# Altium PCB Source_Selector.PcbDoc
Units mm, origin at the board's own origin, x right, y up, seen from the top; angles counter-clockwise.
Board outline 86.21 x 38.86 mm, 4 copper layers (Top Layer, GND, Power, Bottom Layer), stack 1.954 mm thick; 57 components, 40 nets, 185 pads, 18 vias.
Unrouted connection lines stored in the file: 18.
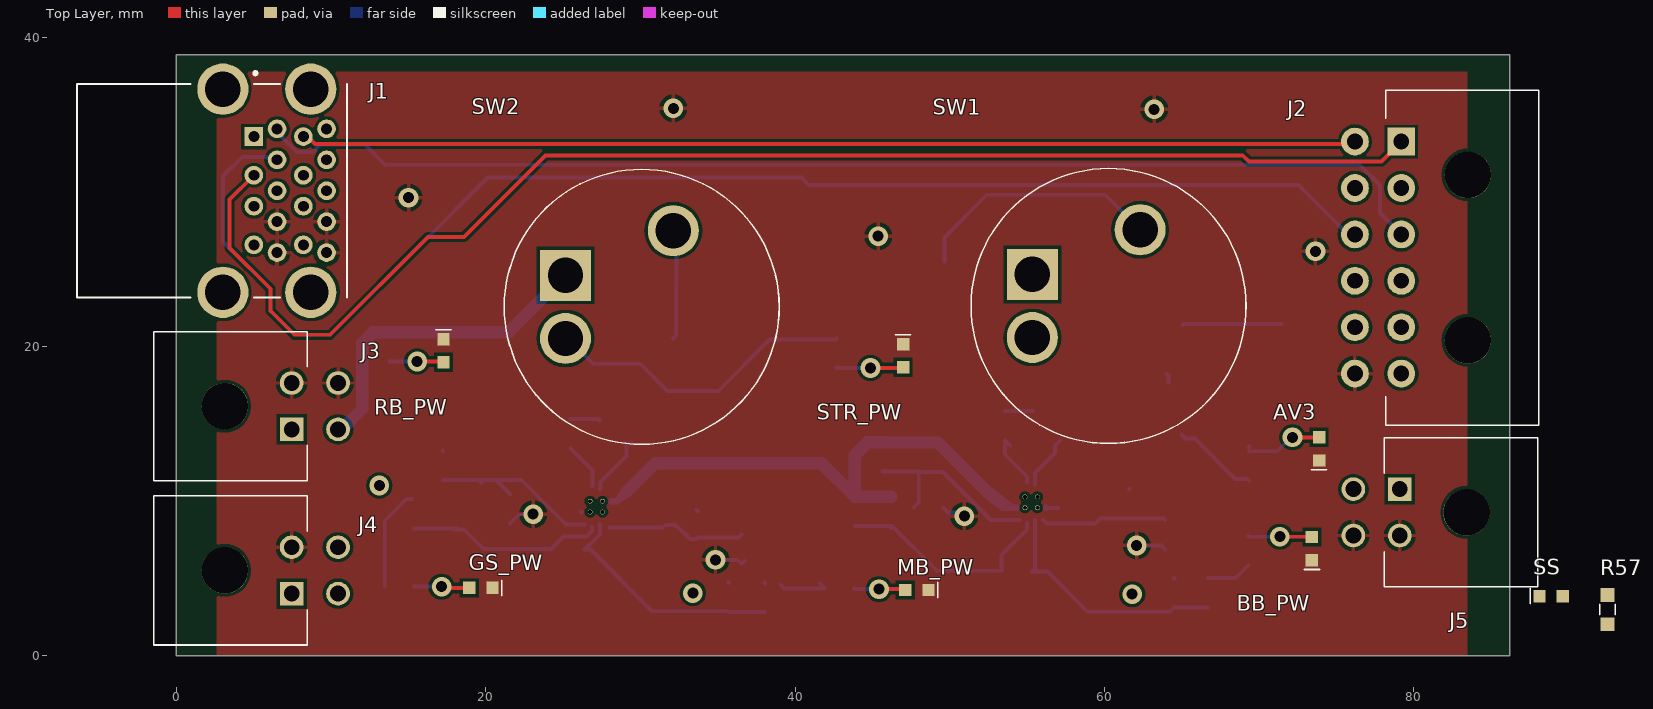
[diagram p0: Top Layer view]
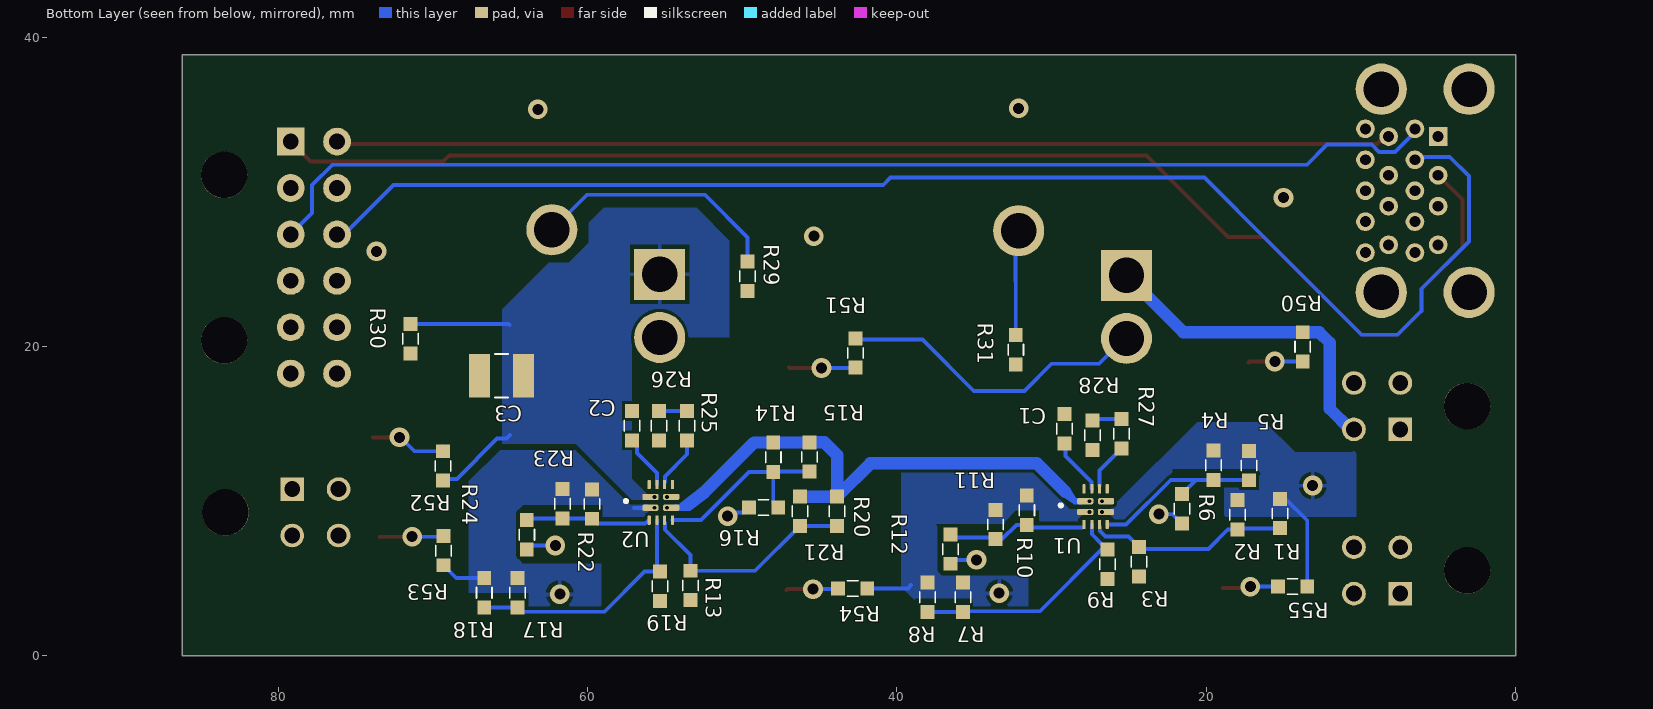
[diagram p1: Bottom Layer view, seen from below]
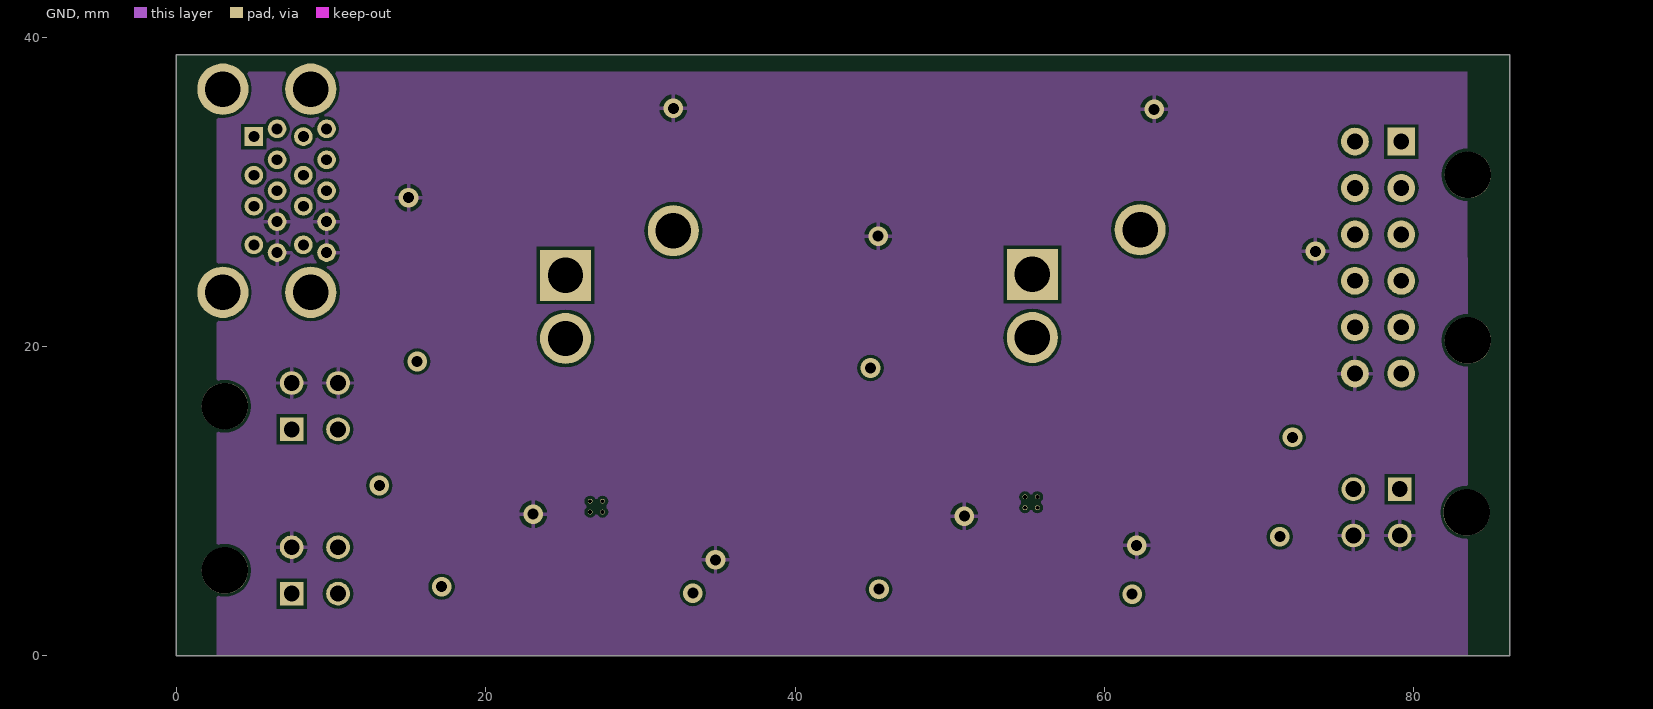
[diagram p2: GND]
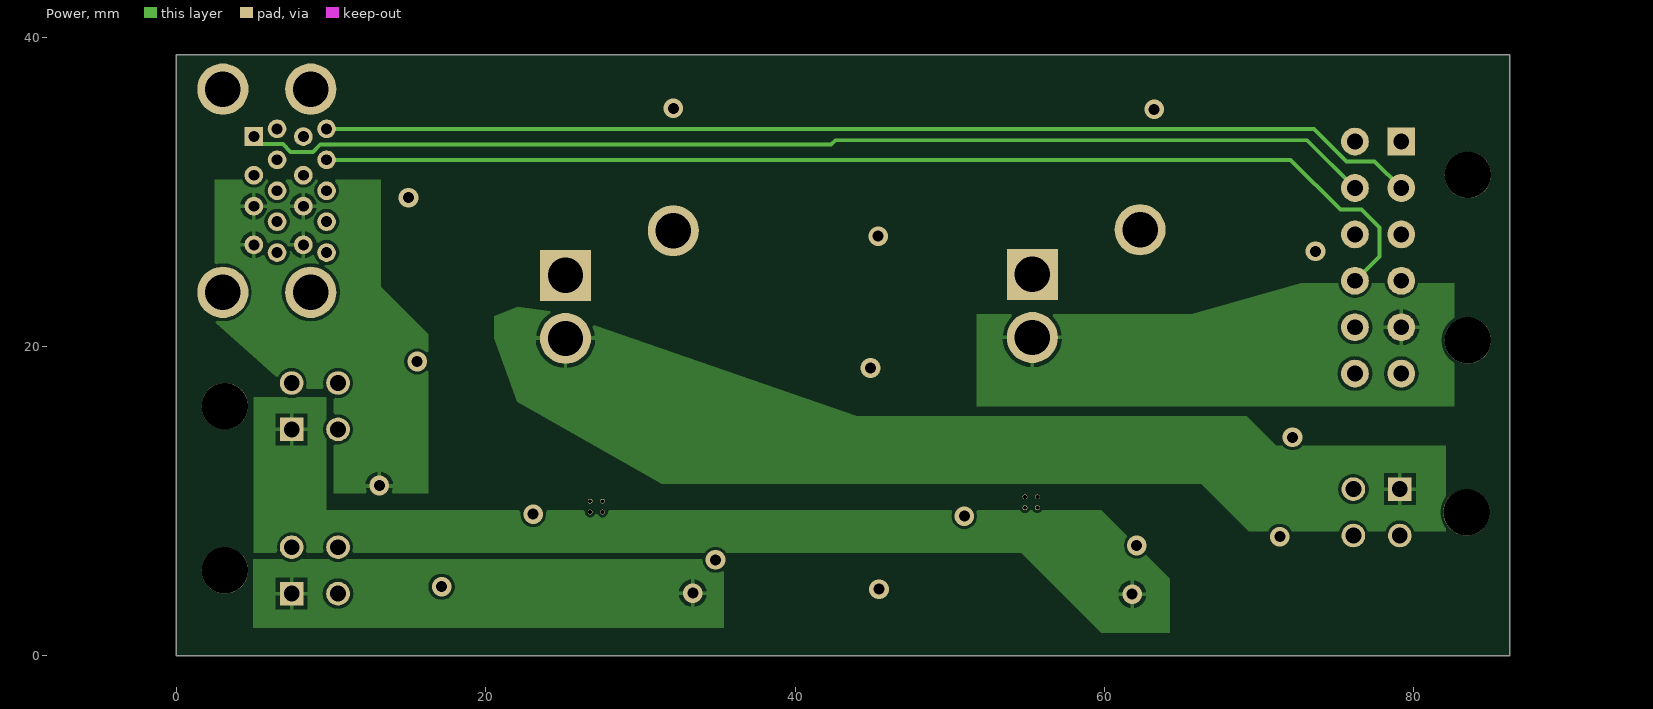
[diagram p3: Power]
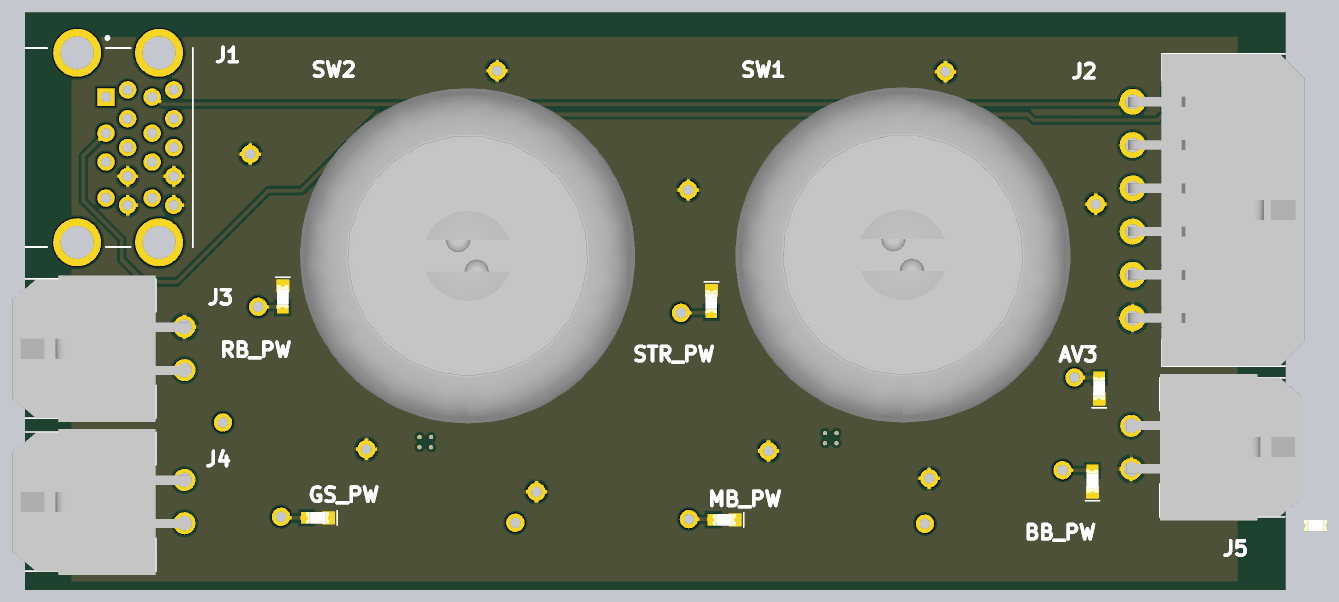
[diagram p4: 3D render of the assembled board from above, using the file's embedded part models]
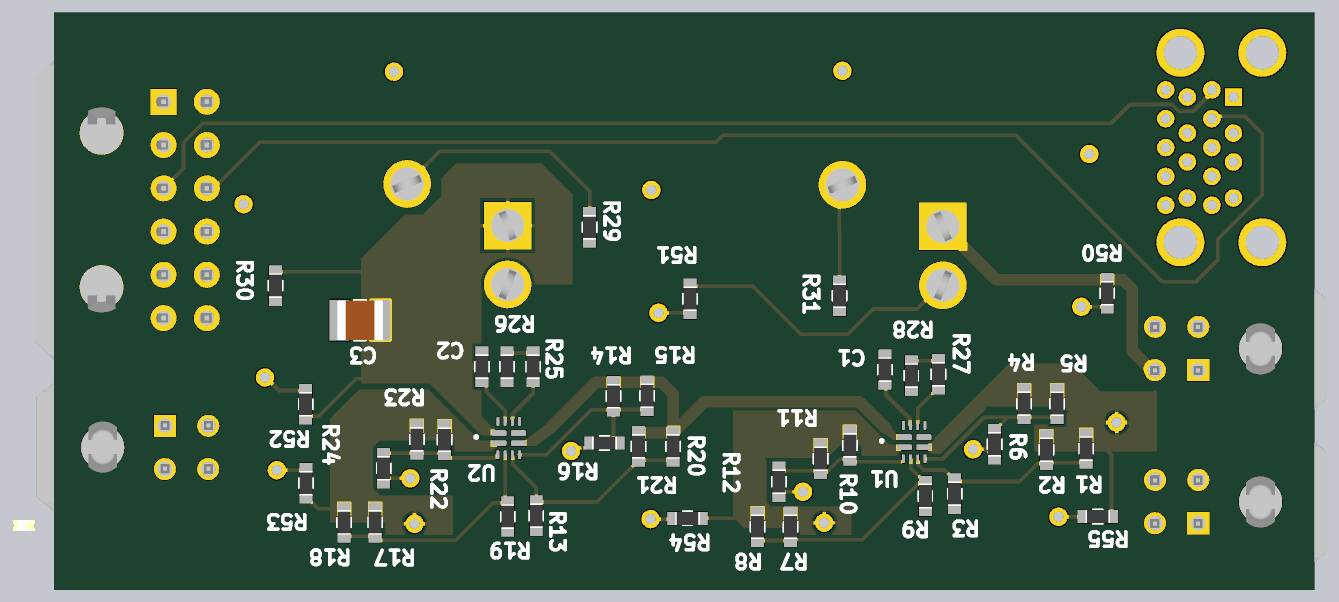
[diagram p5: 3D render of the assembled board from below, using the file's embedded part models]

## Layer stack, top to bottom
Top Solder: solder mask 0.01, Solder Resist, Dk 3.5
Top Layer: signal copper 0.071
Dielectric 2: prepreg 0.071, PP-006, Dk 4.1
GND: signal copper 0.035
Dielectric 1: dielectric 1.6, FR-4, Dk 4.8
Power: signal copper 0.035
Dielectric 3: prepreg 0.071, PP-006, Dk 4.1
Bottom Layer: signal copper 0.071
Bottom Solder: solder mask 0.01, Solder Resist, Dk 3.5

## Board outline
0,0 0,38.862 86.208,38.862 86.208,0

## Design rules (kind name [scope] priority, off if disabled: settings)
Clearance [All] p1: gap=0.204 ignorepadtopadclearanceinfootprint=TRUE
DiffPairsRouting [All] p1: maxlimit=0.254 minlimit=0.254 mostfreqgap=0.254 toplayer_minwidth=0.381 toplayer_maxwidth=0.381 toplayer_prefwidth=0.381 midlayer1_minwidth=0.381 midlayer1_maxwidth=0.381 midlayer1_prefwidth=0.381 midlayer2_minwidth=0.381 midlayer2_maxwidth=0.381 midlayer2_prefwidth=0.381 bottomlayer_minwidth=0.381 bottomlayer_maxwidth=0.381 bottomlayer_prefwidth=0.381 substack1={DE8956C6-F9BE-4731-8523-C3B132525F0B} toplayer_{de8956c6-f9be-4731-8523-c3b132525f0b}_minwidth=0.381 toplayer_{de8956c6-f9be-4731-8523-c3b132525f0b}_maxwidth=0.381 toplayer_{de8956c6-f9be-4731-8523-c3b132525f0b}_prefwidth=0.381 midlayer1_{de8956c6-f9be-4731-8523-c3b132525f0b}_minwidth=0.381 midlayer1_{de8956c6-f9be-4731-8523-c3b132525f0b}_maxwidth=0.381 midlayer1_{de8956c6-f9be-4731-8523-c3b132525f0b}_prefwidth=0.381 midlayer2_{de8956c6-f9be-4731-8523-c3b132525f0b}_minwidth=0.381 midlayer2_{de8956c6-f9be-4731-8523-c3b132525f0b}_maxwidth=0.381 midlayer2_{de8956c6-f9be-4731-8523-c3b132525f0b}_prefwidth=0.381 bottomlayer_{de8956c6-f9be-4731-8523-c3b132525f0b}_minwidth=0.381 bottomlayer_{de8956c6-f9be-4731-8523-c3b132525f0b}_maxwidth=0.381 bottomlayer_{de8956c6-f9be-4731-8523-c3b132525f0b}_prefwidth=0.381 maxuncoupledlength=12.7
PolygonConnect [All] p1: thpad.connectstyle=Relief thpad.reliefconductorwidth=0.254 thpad.reliefentries=4 thpad.polygonreliefangle="90 Angle" thpad.airgapwidth=0.254 smdpad.connectstyle=Direct smdpad.reliefconductorwidth=0.254 smdpad.reliefentries=4 smdpad.polygonreliefangle="90 Angle" smdpad.airgapwidth=0.254 via.connectstyle=Relief via.reliefconductorwidth=0.254 via.reliefentries=4 via.polygonreliefangle="90 Angle" via.airgapwidth=0.254
RoutingVias [All] p1: holewidth=0.711 width=1.27 viastyle="Through Hole" minholewidth=0.711 minwidth=1.27 maxholewidth=0.711 maxwidth=1.27
SolderMaskExpansion [All] p1: expansion=0.102 istentingtop=FALSE
Width [All] p1: maxlimit=1 minlimit=0.204 preferedwidth=0.254 substack1={DE8956C6-F9BE-4731-8523-C3B132525F0B} toplayer_{de8956c6-f9be-4731-8523-c3b132525f0b}_minwidth=0.15 toplayer_{de8956c6-f9be-4731-8523-c3b132525f0b}_maxwidth=0.254 midlayer1_{de8956c6-f9be-4731-8523-c3b132525f0b}_minwidth=0.15 midlayer1_{de8956c6-f9be-4731-8523-c3b132525f0b}_maxwidth=0.254 midlayer2_{de8956c6-f9be-4731-8523-c3b132525f0b}_minwidth=0.15 midlayer2_{de8956c6-f9be-4731-8523-c3b132525f0b}_maxwidth=0.254 bottomlayer_{de8956c6-f9be-4731-8523-c3b132525f0b}_minwidth=0.15 bottomlayer_{de8956c6-f9be-4731-8523-c3b132525f0b}_maxwidth=0.254
29 further rules are at their usual default settings.

## Components (designator, comment, footprint, x,y, rotation, side; value= is the part's Value field where it differs from the comment)
AV3 "LTST-C191KGKT" LTST-C191KGKT 73.884,13.388 r90 top
BB_PW "LTST-C191KGKT" LTST-C191KGKT 73.416,6.942 r90 top
C1 "04025A101JAT2A" 0603[1608] 29.18,14.689 r270 bottom
C2 "04025A101JAT2A" 0603[1608] 57.127,14.892 r270 bottom
C3 "EMK325ABJ107MM-P" CAPC3225X280N 65.573,18.11 r180 bottom
GS_PW "LTST-C191KGKT" LTST-C191KGKT 19.688,4.402 r180 top
J1 "0484060003" MOLEX_0484060003 6.359,30.082 r270 top
J2 "10132449-1221GLF" 10132449-1221GLF 79.849,25.757 r90 top
J3 "0430450400" 0430450400 6.792,16.15 r270 top
J4 "0430450400" 0430450400 6.792,5.533 r270 top
J5 "0430450400" 0430450400 79.763,9.289 r90 top
MB_PW "LTST-C191KGKT" LTST-C191KGKT 47.882,4.265 r180 top
R1 "MCT06030D5112BP500" 0603[1608] 15.224,9.213 r90 bottom
R2 "MCT06030D5112BP500" 0603[1608] 17.988,9.124 r90 bottom
R3 "RT0603BRD075K11L" 0603[1608] 24.343,6.086 r90 bottom
R4 "RNCF0603BTC20K0" 0603[1608] 19.532,12.324 r90 bottom
R5 "RMCF0603FT665K" 0603[1608] 17.241,12.311 r90 bottom
R6 "RT0603BRD075K11L" 0603[1608] 21.572,9.51 r90 bottom
R7 "MCT06030D5112BP500" 0603[1608] 35.727,3.787 r90 bottom
R8 "MCT06030D5112BP500" 0603[1608] 38.013,3.787 r90 bottom
R9 "RT0603BRD075K11L" 0603[1608] 26.38,5.921 r90 bottom
R10 "RT0603BRD0724KL" 0603[1608] 31.607,9.431 r90 bottom
R11 "CPF0603B510KE1" 0603[1608] 33.637,8.501 r90 bottom
R12 "RT0603BRD075K11L" 0603[1608] 36.533,6.911 r90 bottom
R13 "RT0603BRD075K11L" 0603[1608] 53.358,4.559 r90 bottom
R14 "RNCF0603BTC20K0" 0603[1608] 47.998,12.845 r90 bottom
R15 "RMCF0603FT665K" 0603[1608] 45.666,12.865 r90 bottom
R16 "RT0603BRD075K11L" 0603[1608] 48.626,9.596 r180 bottom
R17 "MCT06030D5112BP500" 0603[1608] 64.527,4.087 r90 bottom
R18 "MCT06030D5112BP500" 0603[1608] 66.686,4.087 r90 bottom
R19 "RT0603BRD075K11L" 0603[1608] 55.334,4.498 r90 bottom
R20 "MCT06030D5112BP500" 0603[1608] 43.868,9.355 r90 bottom
R21 "MCT06030D5112BP500" 0603[1608] 46.269,9.36 r90 bottom
R22 "RT0603BRD0724KL" 0603[1608] 59.71,9.825 r90 bottom
R23 "CPF0603B510KE1" 0603[1608] 61.63,9.845 r90 bottom
R24 "RT0603BRD075K11L" 0603[1608] 63.937,7.846 r90 bottom
R25 "RT0603BRE0718KL" 0603[1608] 53.571,14.892 r270 bottom
R26 "RT0603BRD075K11L" 0603[1608] 55.387,14.892 r90 bottom
R27 "RT0603BRE0718KL" 0603[1608] 25.474,14.361 r270 bottom
R28 "RT0603BRD075K11L" 0603[1608] 27.351,14.272 r90 bottom
R29 "CPF0603B510KE1" 0603[1608] 49.654,24.549 r90 bottom
R30 "RT0603BRD0724KL" 0603[1608] 71.443,20.513 r90 bottom
R31 "CPF0603B510KE1" 0603[1608] 32.319,19.794 r90 bottom
R50 "MCT06030C1301FP500" 0603[1608] 13.764,19.982 r90 bottom
R51 "MCT06030C1301FP500" 0603[1608] 42.69,19.588 r90 bottom
R52 "ERA-3AEB2491V" 0603[1608] 69.345,12.286 r270 bottom
R53 "ERA-3AEB2491V" 0603[1608] 69.324,6.815 r270 bottom
R54 "ERA-3AEB2491V" 0603[1608] 42.87,4.374 r180 bottom
R55 "ERA-3AEB2491V" 0603[1608] 14.422,4.493 r180 bottom
R57 "ERA-3AEB2491V" 0603[1608] 92.522,3.002 r90 top
RB_PW "LTST-C191KGKT" LTST-C191KGKT 17.267,19.738 r270 top
SS "LTST-C191KGKT" LTST-C191KGKT 88.887,3.866 r0 top
STR_PW "LTST-C191KGKT" LTST-C191KGKT 46.99,19.416 r270 top
SW1 "Y101132C203NQ" Y101132C203NQ 60.27,22.631 r0 top
SW2 "Y101132C203NQ" Y101132C203NQ 30.087,22.573 r0 top
U1 "TPS2121RUXR" IC_TPS2121RUXR#1 27.152,9.657 r180 bottom
U2 "TPS2121RUXR" IC_TPS2121RUXR#2 55.268,9.934 r180 bottom

## Footprints (in the part's own frame and the unit in brackets; to place one, negate y for a bottom-side part, rotate by r counter-clockwise, add the part's x,y. Pads: shape width x height; smd on the part's side, far side on the other; paste and mask are expansions set on the pad)
0603[1608] [mm]
  rect 0.9x0.9 smd mask+0.05: 1(-0.95,0) 2(0.95,0)
  silkscreen extent -0.35,-0.5 0.35,0.5, body extent -0.85,-0.45 0.85,0.45, height 0.55
10132449-1221GLF [mm] "CONN HEADER R/A 12POS 3MM"
  rect 1.8x1.8 hole 1.02 mask+0.05: 1(7.5,0.65)
  round 1.8 hole 1.02 mask+0.05: 2(7.5,3.65) 3(4.5,0.65) 4(4.5,3.65) 5(1.5,0.65) 6(1.5,3.65) 7(-1.5,0.65) 8(-1.5,3.65) 9(-4.5,0.65) 10(-4.5,3.65) 11(-7.5,0.65) 12(-7.5,3.65)
  round 3 hole 3 mask+0.05: ""(-5.35,-3.65) ""(5.35,-3.65)
  silkscreen extent -10.82,-8.25 10.82,1.65, body extent -10.82,-8.25 10.83,3.97, height 8.78
0430450400 [mm] "4-Pin Molex 3.00mm Pitch"
  round 3 hole 3 unplated mask+0.05: 0(0,-3.66)
  rect 1.53x1.53 hole 1.02 mask+0.05: 1(1.5,0.66)
  round 1.53 hole 1.02 mask+0.05: 2(-1.5,0.66) 3(1.5,3.66) 4(-1.5,3.66)
  silkscreen extent -4.82,-8.25 4.83,1.67, body extent -5.05,-8.25 5.1,3.99, height 8.83
CAPC3225X280N [mm]
  rect 1.37x2.81 smd: 1(-1.42,0) 2(1.42,0)
  silkscreen extent -0.42,-1.4 0.42,1.4, body extent -1.6,-1.4 1.6,1.4, height 2.5
IC_TPS2121RUXR#1 [mm]
  rrect50% 1.05x0.4 smd mask+0: 1(-0.675,0.35) 2(-0.675,-0.35) 7(0.675,-0.35) 8(0.675,0.35)
  round 0.3 hole 0.25 mask+0: 2_1(-0.4,-0.35) 7_1(0.4,-0.35) 8_1(0.4,0.35) 32(-0.4,0.35)
  rrect50% 0.2x0.6 smd mask+0: 3(-0.75,-1.15) 4(-0.25,-1.15) 5(0.25,-1.15) 6(0.75,-1.15) 9(0.75,1.15) 10(0.25,1.15) 11(-0.25,1.15) 12(-0.75,1.15)
  silkscreen extent -2.36,-0.02 -2.16,0.18
IC_TPS2121RUXR#2 [mm]
  rrect50% 1.05x0.4 smd mask+0: 1(-0.675,0.35) 2(-0.675,-0.35) 7(0.675,-0.35) 8(0.675,0.35)
  round 0.3 hole 0.25 mask+0: 1_1(-0.4,0.35) 2_1(-0.4,-0.35) 7_1(0.4,-0.35) 8_1(0.4,0.35)
  rrect50% 0.2x0.6 smd mask+0: 3(-0.75,-1.15) 4(-0.25,-1.15) 5(0.25,-1.15) 6(0.75,-1.15) 9(0.75,1.15) 10(0.25,1.15) 11(-0.25,1.15) 12(-0.75,1.15)
  silkscreen extent -2.36,-0.02 -2.16,0.18
LTST-C191KGKT [mm] "Green 571nm LED Indication - Discrete 2V 0603"
  rect 0.8x0.8 smd paste-3 mask+0.05: 1(-0.75,0) 2(0.75,0)
  silkscreen extent -1.35,-0.5 -1.35,0.5, body extent -0.8,-0.4 0.8,0.4, height 0.8
MOLEX_0484060003 [mm]
  rect 1.208x1.208 hole 0.7: 1(-3.5,-1.35)
  round 1.208 hole 0.7: 2(-1,-1.35) 3(1,-1.35) 4(3.5,-1.35) 5(4,0.15) 6(2,0.15) 7(0,0.15) 8(-2,0.15) 9(-4,0.15) 10(-3.5,1.85) 11(-1,1.85) 12(1,1.85) 13(3.5,1.85) 14(4,3.35) 15(2,3.35) 16(0,3.35) 17(-2,3.35) 18(-4,3.35)
  round 3.316 hole 2.3: S1(-6.57,-3.35) S2(6.57,-3.35) S3(6.57,2.33) S4(-6.57,2.33)
  silkscreen extent -7.7,-12.79 6.9,4.67, body extent -7.25,-12.75 7.25,4.75, height 15.8
Y101132C203NQ [mil] "SWITCH KEYLOCK 2POS SPDT 4A 125V"
  rect 130x130 hole 90 mask+1.97: 1(-194.01,80.36)
  round 130 hole 90 mask+1.97: 3(80.36,194.01) 8(-194.01,-80.36)
  silkscreen extent -350,-350 350,350, body extent -457,-457 457,458, height 1148

## Part data
AV3 BB_PW GS_PW MB_PW RB_PW SS STR_PW: "LED GREEN CLEAR SMD 0603", Colour=Green, Current - Test=20mA, Lens Color=Colourless, Manufacturer="Lite-On Inc.", Millicandela Rating=35mcd, Package / Case="0603 (1608 Metric)", Supplier Part Number 1=160-1446-1-ND, Voltage - Forward (Vf) (Typ)=2V, ComponentLink1Description=Datasheet, ComponentLink1URL=http://optoelectronics.liteon.com/upload/download/DS22-2000-228/LTST-C191KGKT.PDF, Height (Max)=0.65mm, Lens Size="1.10mm x 0.80mm", Lens Style="Rectangle with Flat Top", Lens Transparency=Clear, Manufacturer Part Number=LTST-C191KGKT, Mounting Type="Surface Mount", Size / Dimension="1.60mm L x 0.80mm W", Supplier 1=Digi-Key, Viewing Angle=130°, Wavelength - Dominant=571nm, Wavelength - Peak=574nm
C1 C2: "CAP CER 100PF 50V C0G/NP0 0402", Capacitance=100pF, Manufacturer="AVX Corporation", Operating Temperature="-55°C ~ 125°C", Package / Case="0402 (1005 Metric)", Supplier Part Number 1=478-1082-1-ND, Temperature Coefficient="C0G, NP0", Tolerance=±5%, Voltage - Rated=50V, ComponentLink1Description=Datasheet, ComponentLink1URL=http://datasheets.avx.com/C0GNP0-Dielectric.pdf, Manufacturer Part Number=04025A101JAT2A, Mounting Type="Surface Mount, MLCC", Size / Dimension="0.039\" L x 0.020\" W (1.00mm x 0.50mm)", Supplier 1=Digi-Key, Thickness (Max)="0.022\" (0.56mm)"
C3: "CAP CER 100UF 16V X5R 1210", Capacitance=100µF, Manufacturer="Taiyo Yuden", Operating Temperature="-55°C ~ 85°C", Package / Case="1210 (3225 Metric)", Supplier Part Number 1=587-5426-1-ND, Temperature Coefficient=X5R, Tolerance=±20%, Voltage - Rated=16V, ComponentLink1Description=Datasheet, ComponentLink1URL=https://ds.yuden.co.jp/TYCOMPAS/ut/detail?pn=EMK325ABJ107MM-P%20&u=M, Manufacturer Part Number=EMK325ABJ107MM-P, Mounting Type="Surface Mount, MLCC", Size / Dimension="0.126\"\" L x 0.098\"\" W (3.20mm x 2.50mm)", Supplier 1=Digi-Key, Thickness (Max)="0.110\"\" (2.80mm)"
J1: "USB-A _USB TYPE-A_, Stacked USB 3.0 _USB 3.1 Gen 1, Superspeed_ Receptacle Connector 18 Position Through Hole, Right Angle", Package=None, Availability=Unavailable, MF=Molex, MP=0484060003, Price=None, SnapEDA_Link=https://www.snapeda.com/parts/0484060003/Molex/view-part/424547/?ref=snap
J2: "CONN HEADER R/A 12POS 3MM", Insulation Color=Black, Manufacturer="Amphenol ICC (FCI)", Material Flammability Rating="UL94 V-0", Operating Temperature="-40°C ~ 105°C", Supplier Part Number 1=609-5289-ND, Voltage Rating=250V, ComponentLink1Description=Datasheet, ComponentLink1URL=https://cdn.amphenol-icc.com/media/wysiwyg/files/documentation/datasheet/boardwiretoboard/bwb_minitekpwr3.0_hcc.pdf?__cf_chl_jschl_tk__=5b50c337d7977d3136f5a7e9c1a5138446a86722-1578191481-0-AdRe7fXYrldvOZ_oqyXIDS1Fw-yIkYCF-QCdaR8gv5bvudzwMePuF1OnY_qX9R1SRbUtnU8KyfMeQWvo-tgbYDs0UY0fEf2VYly7RnE44wN6RCRwe79pwwTkwB-vrp_E3FFt_m8Gv1l0VQgfDvqJJh9NWsFdXN6uiHYgEWJHQlxni9pgO_Rgu9b74Q_adNTuUPkDts4F_sjwuXFS2gwZ4qhDRVIbOsJk9z2IFwtIQbJe2Vjr12REDPUJnSIFI5L_m3PVR56FMV99EE0fexLx9E4Xzm8z4yXY4QuL_nxicuZLnFM8rKw84cv6VQDtrcv1h8b5URSWpnxkbKmN-6xqBT_N2gwuiomQytubllip4AB4QtXNO4uZy8p0Kaq8ZXDsS9f0XOGpGrNCvURFRCr5YrB2nakG2mZwStZMD_Rr-W-x1kEQ5VT0_Uar3vHfURsPPw, ComponentLink2Description=Drawing, ComponentLink2URL=https://cdn.amphenol-icc.com/media/wysiwyg/files/drawing/10132449.pdf?__cf_chl_jschl_tk__=3fb7538f61705fd3db72d6547b71e22025aaeae6-1578191484-0-ARZmBU2d2iTfwOyvkDW6juGvz8Wa7jPk-lPTAGC3bi6AwA2PAOw_83XbqimUoaj63c73oghkBl5EBlxfVnJt5FnKIy9_Ampqry6wpxN3P9yFfGzzu2bzrkjXc8H98cNGfE4yNZOx4lVYAc0DYF8iUgUBt3ot3PAqRWTuL_OE0dIKXvMd7u_4fU7igR1oB3QBFAu564mexcV1Dg4phJ9BA4kHFs6CIC10MmA2ZlPsaDWmfr6ivcYRarJOnVBN46Piz5s9Rafd2OkXuSIM4yJjlli4dKOItRDrJD3hRC0iA9RVgXipc9Ibd3Qny2RaW6xQiV-dovtBkpyFUGJQUyK5Difre6fQiv59Vrr2PfvD74WBgrERIBaIQ4JCRXFCC0XHSA, Contact Finish - Mating=Tin, Contact Finish - Post=Tin, Contact Length - Post="0.126\" (3.20mm)", Contact Material="Copper Alloy", Contact Shape=Square, Contact Type="Male Pin", Fastening Type="Locking Ramp", Features="Board Lock, Glow Wire Compliant", Insulation Height="0.343\" (8.71mm)", Insulation Material="Polyamide (PA9T), Nylon 9T", Manufacturer Part Number=10132449-1221GLF, Mounting Type="Through Hole, Right Angle", Number of Positions=12, Number of Positions Loaded=All, Number of Rows=2, Pitch - Mating="0.118\" (3.00mm)", Row Spacing - Mating="0.118\" (3.00mm)", Shrouding="Shrouded - 4 Wall", Style="Board to Cable/Wire", Supplier 1=Digi-Key, Termination=Solder
J3 J4 J5: "CONN HEADER R/A 4POS 3MM", Current Rating (Amps)=8A, Insulation Color=Black, Manufacturer=Molex, Material Flammability Rating="UL94 V-0", Supplier Part Number 1=WM1814-ND, Voltage Rating=600V, ComponentLink1Description=Datasheet, ComponentLink1URL=https://www.molex.com/pdm_docs/sd/430450400_sd.pdf, ComponentLink2Description="Product Specification", ComponentLink2URL=https://www.molex.com/pdm_docs/ps/PS-43045.pdf, Contact Finish - Mating=Tin, Contact Finish - Post=Tin, Contact Finish Thickness - Mating="100.0µin (2.54µm)", Contact Length - Post="0.125\" (3.18mm)", Contact Material=Brass, Contact Shape=Square, Contact Type="0.118\" (3.00mm)", Fastening Type="Locking Ramp", Features="Board Lock", Insulation Height="0.290\" (7.37mm)", Insulation Material="Liquid Crystal Polymer (LCP), Glass Filled", Manufacturer Part Number=0430450400, Mounting Type="Through Hole, Right Angle", Number of Positions=4, Number of Rows=2, Row Spacing - Mating="0.118\" (3.00mm)", Shrouding="Shrouded - 4 Wall", Supplier 1=Digi-Key, Termination=Solder
R1 R2 R7 R8 R17 R18 R20 R21: "RES SMD 51.1KOHM 0.1% 1/10W 0603", Manufacturer="Vishay Beyschlag/Draloric/BC Components", Operating Temperature="-55°C ~ 125°C", Package="0603 (1608 Metric)", Power  (W)=0.1W, Resistance=51.1K, Supplier Part Number 1=749-MCT06030D5112BP500CT-ND, Temperature Coefficient=±25ppm/°C, Tolerance=±0.1%, ComponentLink1Description=Datasheet, ComponentLink1URL=https://www.vishay.com/docs/28700/mcx0x0xpre.pdf, Composition="Thin Film", Manufacturer Part Number=MCT06030D5112BP500, Supplier 1=Digi-Key
R3 R9 R13 R19: library part RQ73C1J2K1BTD, "RES 2.1 KOHMS 0.1% 0.15W 0603", Manufacturer="TE Connectivity Passive Product", Operating Temperature="-55°C ~ 155°C", Package="0603 (1608 Metric)", Power  (W)=0.1W, Resistance=2.1K, Supplier Part Number 1=A140446TR-ND, Temperature Coefficient=±10ppm/°C, Tolerance=±0.1%, ComponentLink1Description=Datasheet, ComponentLink1URL=https://media.digikey.com/pdf/Data%20Sheets/Tyco%20Electronics%20P%20B%20PDFs/RQ73-0618%20v2.pdf, Composition="Thin Film", Manufacturer Part Number=RQ73C1J2K1BTD, Supplier 1=Digi-Key
R4 R14: "RES 20K OHM 0.1% 1/10W 0603", Manufacturer="Stackpole Electronics Inc", Operating Temperature="-55°C ~ 155°C", Package="0603 (1608 Metric)", Power  (W)=0.1W, Resistance=20K, Supplier Part Number 1=RNCF0603BTC20K0CT-ND, Temperature Coefficient=±50ppm/°C, Tolerance=±0.1%, ComponentLink1Description=Datasheet, ComponentLink1URL=https://www.seielect.com/catalog/sei-rncf.pdf, Composition="Thin Film", Manufacturer Part Number=RNCF0603BTC20K0, Supplier 1=Digi-Key
R5 R15: "RES 665K OHM 1% 1/10W 0603", Manufacturer="Stackpole Electronics Inc", Operating Temperature="-55°C ~ 155°C", Package="0603 (1608 Metric)", Power  (W)=0.1W, Resistance=665K, Supplier Part Number 1=RMCF0603FT665KCT-ND, Temperature Coefficient=±100ppm/°C, Tolerance=±1%, ComponentLink1Description=Datasheet, ComponentLink1URL=https://www.seielect.com/catalog/sei-rmcf_rmcp.pdf, Composition="Thick Film", Manufacturer Part Number=RMCF0603FT665K, Supplier 1=Digi-Key
R6 R12 R16 R24 R26 R28: "RES SMD 5.11KOHM 0.1% 1/10W 0603", Manufacturer=Yageo, Operating Temperature="-55°C ~ 155°C", Package="0603 (1608 Metric)", Power  (W)=0.1W, Resistance=5.11K, Supplier Part Number 1=YAG1695CT-ND, Temperature Coefficient=±25ppm/°C, Tolerance=±0.1%, ComponentLink1Description=Datasheet, ComponentLink1URL=https://www.yageo.com/upload/media/product/productsearch/datasheet/rchip/PYu-RT_1-to-0.01_RoHS_L_12.pdf, Composition="Thin Film", Manufacturer Part Number=RT0603BRD075K11L, Supplier 1=Digi-Key
R10 R22 R30: "RES SMD 24K OHM 0.1% 1/10W 0603", Manufacturer=Yageo, Operating Temperature="-55°C ~ 155°C", Package="0603 (1608 Metric)", Power  (W)=0.1W, Resistance=24K, Supplier Part Number 1=YAG1600CT-ND, Temperature Coefficient=±25ppm/°C, Tolerance=±0.1%, ComponentLink1Description=Datasheet, ComponentLink1URL=https://www.yageo.com/upload/media/product/productsearch/datasheet/rchip/PYu-RT_1-to-0.01_RoHS_L_12.pdf, Composition="Thin Film", Manufacturer Part Number=RT0603BRD0724KL, Supplier 1=Digi-Key
R11 R23 R29 R31: "RES SMD 510K OHM 0.1% 1/16W 0603", Manufacturer="TE Connectivity Passive Product", Operating Temperature="-55°C ~ 155°C", Package="0603 (1608 Metric)", Power  (W)=1/16W, Resistance=510K, Supplier Part Number 1=A102291CT-ND, Temperature Coefficient=±25ppm/°C, Tolerance=±0.1%, ComponentLink1Description=Datasheet, ComponentLink1URL=https://www.te.com/commerce/DocumentDelivery/DDEController?Action=srchrtrv&DocNm=1773200&DocType=DS&DocLang=English, Composition="Thin Film", Manufacturer Part Number=CPF0603B510KE1, Supplier 1=Digi-Key
R25 R27: "RES SMD 18K OHM 0.1% 1/10W 0603", Manufacturer=Yageo, Operating Temperature="-55°C ~ 155°C", Package="0603 (1608 Metric)", Power  (W)=0.1W, Resistance=18K, Supplier Part Number 1=YAG4641CT-ND, Temperature Coefficient=±50ppm/°C, Tolerance=±0.1%, ComponentLink1Description=Datasheet, ComponentLink1URL=https://www.yageo.com/upload/media/product/productsearch/datasheet/rchip/PYu-RT_1-to-0.01_RoHS_L_12.pdf, Composition="Thin Film", Manufacturer Part Number=RT0603BRE0718KL, Supplier 1=Digi-Key
R50 R51: "RES SMD 1.3K OHM 1% 1/8W 0603", Manufacturer="Vishay Beyschlag", Operating Temperature="-55°C ~ 155°C", Package="0603 (1608 Metric)", Power  (W)=1/8W, Resistance=1.3K, Supplier Part Number 1=749-1605-1-ND, Temperature Coefficient=±50ppm/°C, Tolerance=±1%, ComponentLink1Description=Datasheet, ComponentLink1URL=http://www.vishay.com/docs/28705/mcx0x0xpro.pdf, Composition="Thin Film", Manufacturer Part Number=MCT06030C1301FP500, Supplier 1=Digi-Key
R52 R53 R54 R55 R57: "RES SMD 2.49KOHM 0.1% 1/10W 0603", Manufacturer="Panasonic Electronic Components", Operating Temperature="-55°C ~ 155°C", Package="0603 (1608 Metric)", Power  (W)=0.1W, Resistance=2.49K, Supplier Part Number 1=P2.49KDBCT-ND, Temperature Coefficient=±25ppm/°C, Tolerance=±0.1%, ComponentLink1Description=Datasheet, ComponentLink1URL=https://industrial.panasonic.com/cdbs/www-data/pdf/RDM0000/AOA0000C307.pdf, Composition="Thin Film", Manufacturer Part Number=ERA-3AEB2491V, Supplier 1=Digi-Key
SW1 SW2: "SWITCH KEYLOCK 2POS SPDT 4A 125V", Current Rating (Amps)="4A (AC/DC)", Manufacturer=C&K, Supplier Part Number 1=CKN11517-ND, Voltage Rating - AC=125V, Voltage Rating - DC=28V, Actuator Type="Flat Key", Angle of Throw=90°, Circuit=SPDT, ComponentLink1Description=Datasheet, ComponentLink1URL=https://dznh3ojzb2azq.cloudfront.net/products/Switchlock/Y/documents/datasheet.pdf, Contact Finish=Silver, Contact Material=Copper, Contact Timing="Not Specified", Depth Behind Flange=28.83mm, Electrical Life="10,000 Cycles", Key Removable Positions="1 only", Manufacturer Part Number=Y101132C203NQ, Mounting Type="Panel Mount", Number of Positions=2, Panel Cutout Dimensions="Circular - 19.30mm Dia", Supplier 1=Digi-Key, Switch Function=On-On, Termination Style="Solder Lug"
U1 U2: "PWR MGMT BATTERY MGMT", ComponentLink1Description=Datasheet, ComponentLink1URL=https://www.ti.com/general/docs/suppproductinfo.tsp?distId=10&gotoUrl=http%253A%252F%252Fwww.ti.com%252Flit%252Fgpn%252Ftps2120, Supplier 1="Arrow Electronics", Supplier Part Number 1=TPS2121RUXR

## Via types
v1: diameter 1.27, hole 0.711, Top Layer to Bottom Layer, 18 vias

## Nets (pads, with @x,y where several pads share a name; then routed paths per layer and width w, separated by ;. In a path a pad name is that pad's centre, name@x,y a point inside that pad or via, vN(x,y) a via of type N, cw(c..) or ccw(c..) an arc to the next point about the centre after c; other vN are vias at no path point)
"7.5V Recovery Bat": J3.3 R50.2 SW2.1 | length 21.3
  Bottom Layer w0.254: J3.3 J3.3@10.688,14.65
  Bottom Layer w0.8: J3.3@10.688,14.65 12.019,15.982 12.019,20.251 12.7,20.932 R50.2 21.478,20.932 SW2.1
"12V Backup Bat": J3.1 R17.2 R18.2 R22.2 R23.2 R53.2 U2.2 | length 3.9
  Bottom Layer w0.254: U2.2@56.199,9.584 56.212,9.571 57.008,9.571 ; R23.2@61.61,10.775 R23.2 ; R17.2@64.512,5.022 R17.2 ; R18.2 68.496,5.037 R53.2
  Bottom Layer w0.4: U2.2@56.199,9.584 U2.2@56.268,9.584
  other v1: 61.801,3.995
"12V Main Bat": J4.1 R7.2 R8.2 R10.2 R11.2 R54.2 U1.2 | length 3.6
  Bottom Layer w0.254: v1(33.393,4.067) v1@33.393,4.094 ; R11.2 R11.2@33.72,9.368 ; R7.2@35.712,4.752 R7.2 ; R8.2 R8.2@38.053,4.697 ; 39.083,4.58 39.289,4.374 R54.2 R54.2@41.597,4.697
GND: AV3.1 BB_PW.1 C1.1 C2.1 C3.1 GS_PW.1 J1.5 J1.6 J1.14 J1.15 J2.12 J3.2 J3.4 J4.2 J5.2 J5.4 MB_PW.1 R3.1 R6.1 R9.1 R12.1 R13.1 R16.1 R19.1 R24.1 R26.1 R28.1 R29.1 R30.1 R31.1 RB_PW.1 SS.1 STR_PW.1 U1.12 U2.9 U2.12 | length 7.3
  Bottom Layer w0.254: R6.1 22.177,9.164 v1(23.071,9.164) ; v1(34.859,6.213) 36.281,6.213 R12.1 R12.1@36.726,6.154 ; R16.1 49.899,9.273 50.437,9.273 50.67,9.04 v1(50.945,9.04) ; v1(62.093,7.145) 63.688,7.145 R24.1
  other v1: 73.65,26.157 45.38,27.142 15.011,29.634 63.221,35.342 32.131,35.405
"GS PROP1 12V": J1.1 J2.4 | length 75.2
  GND w0.254: J1.1 J1.1@5.486,33.105
  Power w0.254: J1.1 5.486,33.105 6.093,33.105 6.101,33.097 6.887,33.097 7.387,32.597 8.831,32.597 9.301,33.067 42.33,33.067 42.609,33.345 73.112,33.345 J2.4
  Bottom Layer w0.254: J1.1@4.532,33.105 J1.1 J1.1@5.486,33.105
"GS PROP2 12V": J1.8 J2.6 | length 90.5
  Bottom Layer w0.254: J1.8 6.333,32.258 4.257,32.258 3.02,31.021 3.02,26.8 6.099,23.721 6.099,22.301 7.633,20.767 9.959,20.767 15.831,26.638 20.124,30.932 40.406,30.932 40.889,30.45 72.553,30.45 75.745,27.257 J2.6
"GS PROP3 12V": J1.17 J2.8 | length 74
  Power w0.254: J1.17 72.038,32.082 75.255,28.865 76.632,28.865 77.782,27.714 77.782,25.84 J2.8
"LAUNCH 12V": J1.2 J2.1 | length 90
  Top Layer w0.254: J1.2 3.434,29.507 3.434,26.386 6.099,23.721 6.099,22.301 7.633,20.767 9.944,20.767 16.274,27.097 18.585,27.097 23.861,32.372 68.948,32.372 69.344,31.976 77.918,31.976 J2.1
  Bottom Layer w0.254: J1.2@5.009,30.89 J1.2
NetAV3_2: AV3.2 R52.1 | length 5
  Top Layer w0.254: v1(72.169,14.138) AV3.2
  Bottom Layer w0.254: R52.1 71.197,13.236 72.099,14.138 v1(72.169,14.138) ; R52.1@69.345,13.487 R52.1@69.392,13.534
NetBB_PW_2: BB_PW.2 R53.1 | length 4.1
  Top Layer w0.254: v1(71.346,7.709) 73.399,7.709 BB_PW.2
  Bottom Layer w0.254: R53.1 69.38,7.709 v1(71.346,7.709)
NetC1_2: C1.2 U1.11 | length 3.9
  Bottom Layer w0.254: U1.11 27.421,10.826 27.421,11.236 29.117,12.931 29.117,13.729 C1.2@29.428,13.729
NetC2_2: C2.2 U2.11 | length 3.5
  Bottom Layer w0.254: U2.11 55.518,11.826 56.804,13.111 56.804,13.619 C2.2
NetC3_2: C3.2 R30.2 R52.2 SW1.1 U2.1 | length 12.6
  Bottom Layer w0.254: C3.2@64.031,18.232 C3.2 C3.2@64.153,17.675 ; 65.016,14.275 65.24,14.051 65.852,14.051 68.448,11.455 69.225,11.455 R52.2 ; 65.037,21.399 65.1,21.463 R30.2
NetGS_PW_2: GS_PW.2 R55.1 | length 3.6
  Top Layer w0.254: v1(17.148,4.481) 17.226,4.402 GS_PW.2
  Bottom Layer w0.254: R55.1 15.384,4.481 v1(17.148,4.481)
NetMB_PW_2: MB_PW.2 R54.1 | length 3.4
  Top Layer w0.254: v1(45.428,4.318) 47.078,4.318 MB_PW.2
  Bottom Layer w0.254: R54.1 43.876,4.318 v1(45.428,4.318)
NetR1_1: R1.1 R2.1 R3.2 U1.5 | length 12.8
  Bottom Layer w0.254: R1.1@15.354,8.237 R2.1@18.148,8.237 ; R2.1 18.61,8.174 19.855,6.929 R3.2@24.251,6.929 ; R3.2 25.027,7.72 26.524,7.72 26.883,8.079 U1.5@26.883,8.334
NetR4_1: R4.1 R5.1 R6.2 U1.6 | length 12.4
  Bottom Layer w0.254: R5.1 17.254,11.374 R4.1 ; R4.1@19.728,11.179 R4.1 ; R6.2 20.658,11.374 ; 25.381,8.507 U1.6 ; 25.892,8.495 25.178,8.495 22.299,11.374 20.658,11.374 ; R4.1 20.658,11.374
NetR7_1: R7.1 R8.1 R9.2 U1.4 | length 15.4
  Bottom Layer w0.254: U1.4 27.391,8.496 27.391,7.868 26.735,7.212 26.721,7.212 R9.2 26.779,6.871 30.757,2.893 35.671,2.893 R7.1 R8.1
NetR10_1: R10.1 R11.1 R12.2 U1.3 | length 9.1
  Bottom Layer w0.254: 28.02,8.299 31.425,8.299 R10.1 32.28,8.481 33.21,7.551 R11.1 33.753,7.668 36.339,7.668 R12.2
NetR13_2: R13.2 R20.1 R21.1 U2.5 | length 14.6
  Bottom Layer w0.254: R20.1 46.213,8.405 46.269,8.349 R21.1@46.203,8.283 ; R21.1 49.17,5.509 R13.2 53.358,6.52 54.999,8.162 U2.5@54.999,8.611
NetR14_1: R14.1 R15.1 R16.2 U2.6 | length 12.6
  Bottom Layer w0.254: R15.1 47.978,11.915 R14.1 ; R16.2 47.998,9.918 R14.1 ; U2.6 52.682,8.784 49.561,11.905 48.008,11.905 R14.1
NetR14_2: R14.2 R15.2 R20.2 R21.2 U1.1 U2.7 | length 35.6
  Bottom Layer w0.254: U1.1@28.083,10.007 U1.1@28.114,10.038 ; R20.2@43.799,10.247 43.799,10.374 R20.2 ; R21.2@46.203,10.183 46.269,10.249 R21.2@46.213,10.305
  Bottom Layer w0.4: U1.1@28.083,10.007 28.508,10.007 29.126,10.624 ; 52.405,10.635 53.456,9.584 U2.7@54.337,9.584
  Bottom Layer w0.8: 29.126,10.624 30.952,12.451 41.722,12.451 R20.2@43.799,10.374 ; R15.2@45.666,13.805 49.235,13.805 52.405,10.635 ; R15.2 44.686,13.815 43.868,12.997 R20.2 R21.2@46.213,10.305
NetR17_1: R17.1 R18.1 R19.2 U2.4 | length 16
  Bottom Layer w0.254: U2.4 55.518,5.633 R19.2 56.316,5.448 58.905,2.86 64.25,2.86 R17.1 R18.1
NetR22_1: R22.1 R23.1 R24.2 U2.3 | length 8.2
  Bottom Layer w0.254: U2.3@56.045,8.784 56.274,8.555 59.39,8.555 R22.1 61.61,8.875 R23.1 63.838,8.895 R24.2
NetR25_1: R25.1 R26.2 | length 1.8
  Bottom Layer w0.254: R25.1 R26.2
NetR25_2: R25.2 U2.10 | length 3.7
  Bottom Layer w0.254: R25.2@53.894,13.619 R25.2 53.571,13.043 55.01,11.603 U2.10@55.01,11.257
NetR27_1: R27.1 R28.2 | length 1.9
  Bottom Layer w0.254: R27.1 27.262,15.311 R28.2
NetR27_2: R27.2 U1.10 | length 3
  Bottom Layer w0.254: R27.2 26.894,11.991 U1.10@26.894,10.98
NetR29_2: R29.2 SW1.3 | length 16.3
  Bottom Layer w0.254: R29.2 49.654,27.052 52.425,29.822 60.048,29.822 SW1.3
NetR31_2: R31.2 SW2.3 | length 7.2
  Bottom Layer w0.254: R31.2@32.106,20.531 R31.2 32.319,24.221 32.337,24.239 32.337,27.292 SW2.3
NetR50_1: R50.1 RB_PW.2 | length 3.5
  Top Layer w0.254: v1(15.563,19.042) 17.213,19.042 RB_PW.2
  Bottom Layer w0.254: R50.1 13.774,19.042 v1(15.563,19.042)
NetR51_1: R51.1 STR_PW.2 | length 4.3
  Top Layer w0.254: v1(44.882,18.621) 46.945,18.621 STR_PW.2
  Bottom Layer w0.254: R51.1 42.708,18.621 v1(44.882,18.621)
NetR57_1: R57.1 SS.2
NetR57_2: R57.2 U1.9
"POWER 12V": J1.3 J1.4 J1.12 J1.13 R1.2 R2.2 R4.2 R5.2 R55.2 U1.7 | length 7.1
  Bottom Layer w0.254: J1.13@8.209,26.182 J1.13 ; R55.2 13.472,8.768 14.867,10.163 R1.2 ; R5.2@17.228,13.274 R5.2 ; U1.7@26.159,9.307 26.19,9.276 U1.7@26.221,9.307
  other v1: 13.117,11.019
RX: J1.9 J2.5 | length 78
  Power w0.254: J1.9@6.251,34.34 J1.9@6.509,34.34 ; J1.9@6.256,34.082 J1.9 ; J2.5@79.107,27.165 J2.5
  Bottom Layer w0.254: J1.9@6.509,34.34 J1.9 6.509,33.889 7.801,32.597 8.831,32.597 9.302,33.068 12.182,33.068 13.49,31.76 76.508,31.76 77.817,30.451 77.817,28.64 J2.5
"SOL CTRL 12V": J1.10 J2.2 | length 68.7
  Top Layer w0.254: J1.10 8.467,33.582 8.952,33.097 76.039,33.097 J2.2
  GND w0.254: J1.10 J1.10@8.467,33.582 ; J2.2@76.036,33.094 J2.2
"Stratologger Power": J5.1 R51.2 SW2.8 | length 20.3
  Bottom Layer w0.254: SW2.8 25.289,20.531 26.927,18.893 30.005,18.893 31.753,17.145 35.034,17.145 38.358,20.469 42.62,20.469 R51.2
TX: J1.18 J2.3 | length 71.1
  Power w0.254: J1.18 73.563,34.082 75.669,31.976 77.48,31.976 J2.3
Vout: J2.9 SW1.8
pads on no net: J1.7 J1.11 J1.16 J1.S1 J1.S2 J1.S3 J1.S4 J2. J2.7 J2.10 J2.11 J3.0 J4.0 J4.3 J4.4 J5.0 J5.3 U1.2_1 U1.7_1 U1.8 U1.8_1 U1.32 U2.1_1 U2.2_1 U2.7_1 U2.8 U2.8_1

## Polygon pours and split planes (outlines as drawn)
"Stratologger Power" on Power "Power-Stratologger Power" (solid, pour order 30): 20.538,20.547 20.538,21.959 22.068,22.591 24.446,22.253 44.036,15.494 69.202,15.494 71.102,13.594 82.062,13.594 82.062,8.062 69.339,8.062 66.281,11.12 31.377,11.12 22.032,16.434
Vout on Power "Power-Vout" (solid, pour order 38): 82.634,24.087 82.634,16.162 51.747,16.162 51.747,22.088 65.622,22.088 72.71,24.087
"POWER 12V" on Power "Power-POWER 12V" (solid, pour order 36): 2.479,30.803 13.228,30.803 13.228,23.858 16.274,20.813 16.274,10.508 10.168,10.508 10.168,17.272 7.33,17.272 2.479,21.609
"12V Backup Bat" on Power "Power-12V Backup Bat" (solid, pour order 34): 64.237,5.001 64.237,1.491 59.789,1.491 54.613,6.667 4.999,6.667 4.999,16.741 5.243,16.741 9.7,16.741 9.7,9.435 59.803,9.435
"12V Main Bat" on Power "Power-12V Main Bat" (solid, pour order 32): 35.405,6.256 35.405,1.834 4.976,1.834 4.976,2.314 4.976,6.256
GND on GND "GND-GND" (solid, pour order 42): 83.51,0 83.463,37.761 2.614,37.761 2.614,0.001
GND on Top Layer "Top Layer-GND" (solid, pour order 60): 7.046,-7.453 87.854,-7.453 87.942,-7.365 87.896,-7.318 87.896,30.306 7.046,30.306
"POWER 12V" on Bottom Layer "POWER_12V_L04_P067" (solid, pour order 67): 25.733,8.801 25.885,8.801 26.391,9.307 20.579,15.119 20.536,15.121 16.284,15.121 16.246,15.159 14.257,13.17 10.571,13.17 10.472,13.269 10.317,13.114 10.317,9.017 18.88,9.017 18.898,9.035 18.832,9.1 18.832,10.874 17.353,10.874 16.441,11.786 16.774,12.118 22.195,12.118 22.195,11.882 25.276,8.801
"12V Main Bat" on Bottom Layer "12V_MAIN_BAT_L04_P066" (solid, pour order 66): 27.827,9.307 28.303,8.831 28.303,8.7 30.772,8.7 30.787,8.684 30.803,8.7 30.803,9.411 32.319,9.411 33.045,8.684 33.045,8.562 37.424,8.562 37.485,8.501 37.409,8.425 37.409,5.474 37.12,5.184 31.516,5.184 31.501,5.169 31.501,3.139 35.014,3.139 35.105,3.231 35.105,3.716 38.816,3.716 38.892,3.64 39.726,4.473 39.726,11.88 31.227,11.88 28.834,9.487 28.001,9.487
NetC3_2 on Bottom Layer "NETC3_2_L04_P065" (solid, pour order 65): 59.931,26.714 61.218,25.428 62.504,25.428 65.519,22.413 65.519,13.734 60.78,13.734 57.145,10.099 56.384,10.099 56.227,10.257 56.144,10.455 57.145,11.455 57.145,20.531 57.084,20.592 50.83,20.592 50.83,26.845 52.951,28.966 58.966,28.966 59.931,28.001
"12V Backup Bat" on Bottom Layer "12V_BACKUP_BAT_L04_P064" (solid, pour order 64): 55.618,9.782 56.388,9.012 59.025,9.012 59.025,9.782 64.153,9.782 64.663,9.271 64.663,6.441 64.186,5.964 59.134,5.964 59.134,3.264 59.169,3.228 63.817,3.228 63.817,4.127 63.856,4.089 67.676,4.089 67.676,11.293 65.664,13.305 60.8,13.305 57.277,9.782

## Silkscreen, mask and mechanical layers (free items; w line width, h text height)
Board:
  the board outline again, w1.2